# EAGLE board labwiz-board-0.3 (EAGLE 6.5.0)
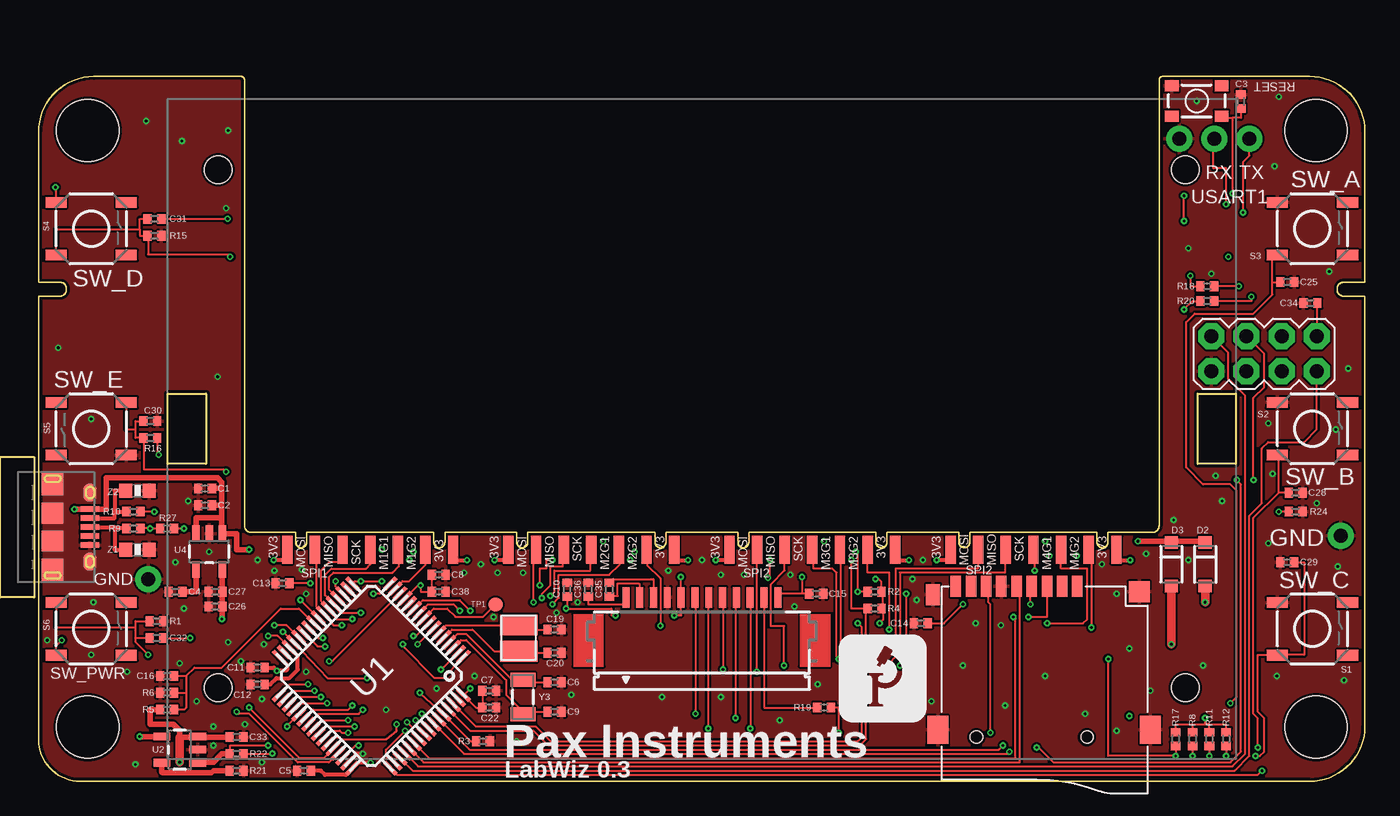
[diagram p0: board, top side]
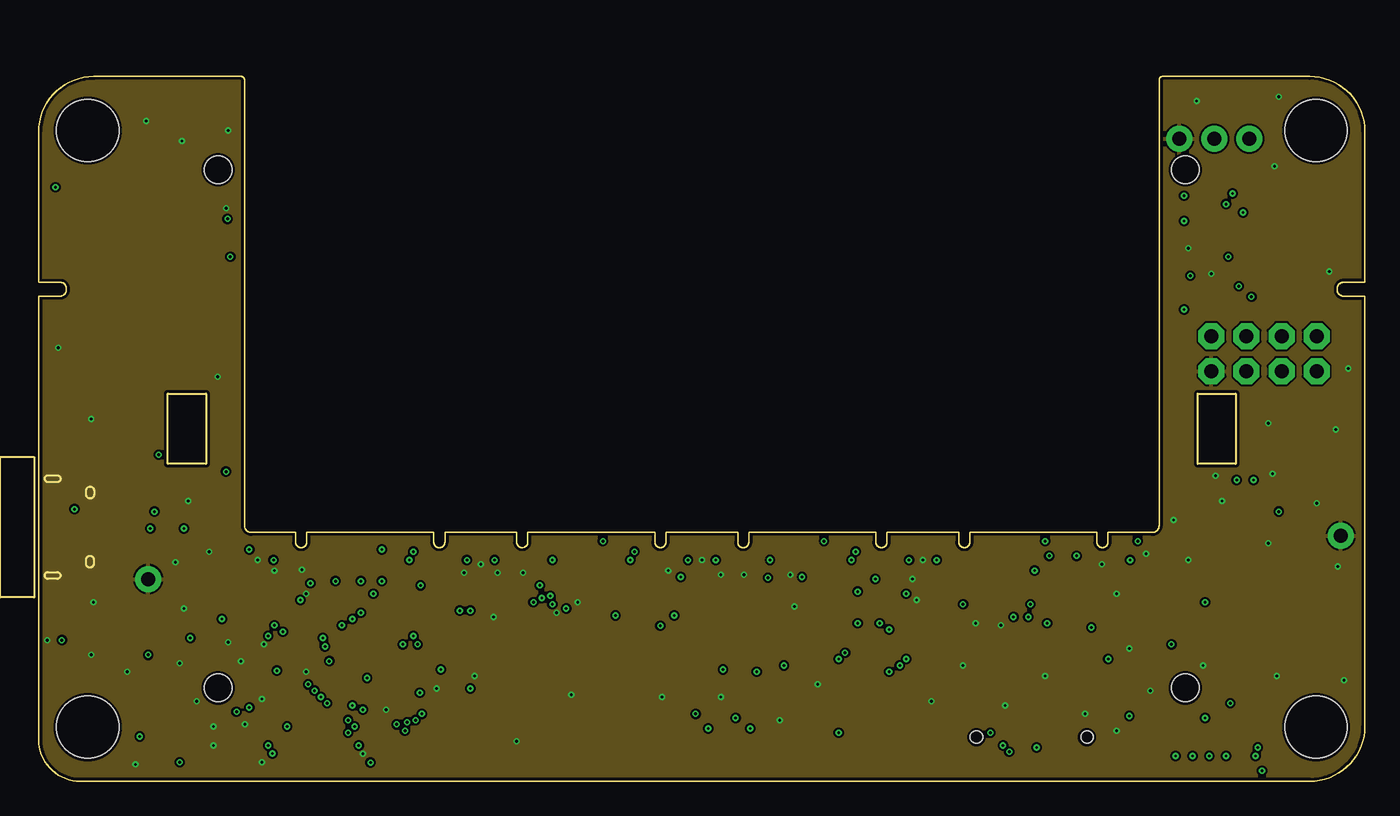
[diagram p1: board, inner layer GND]
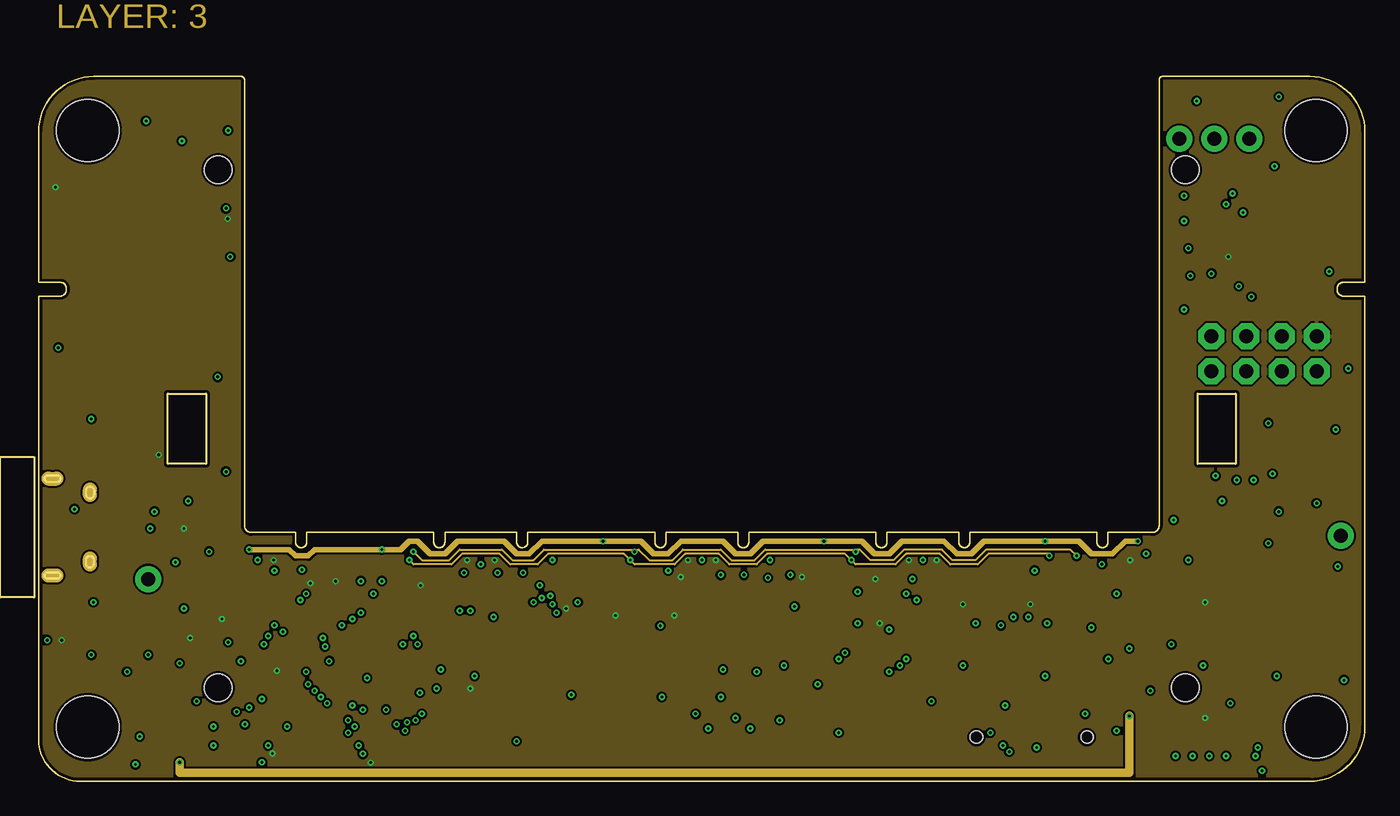
[diagram p2: board, inner layer 3.3V]
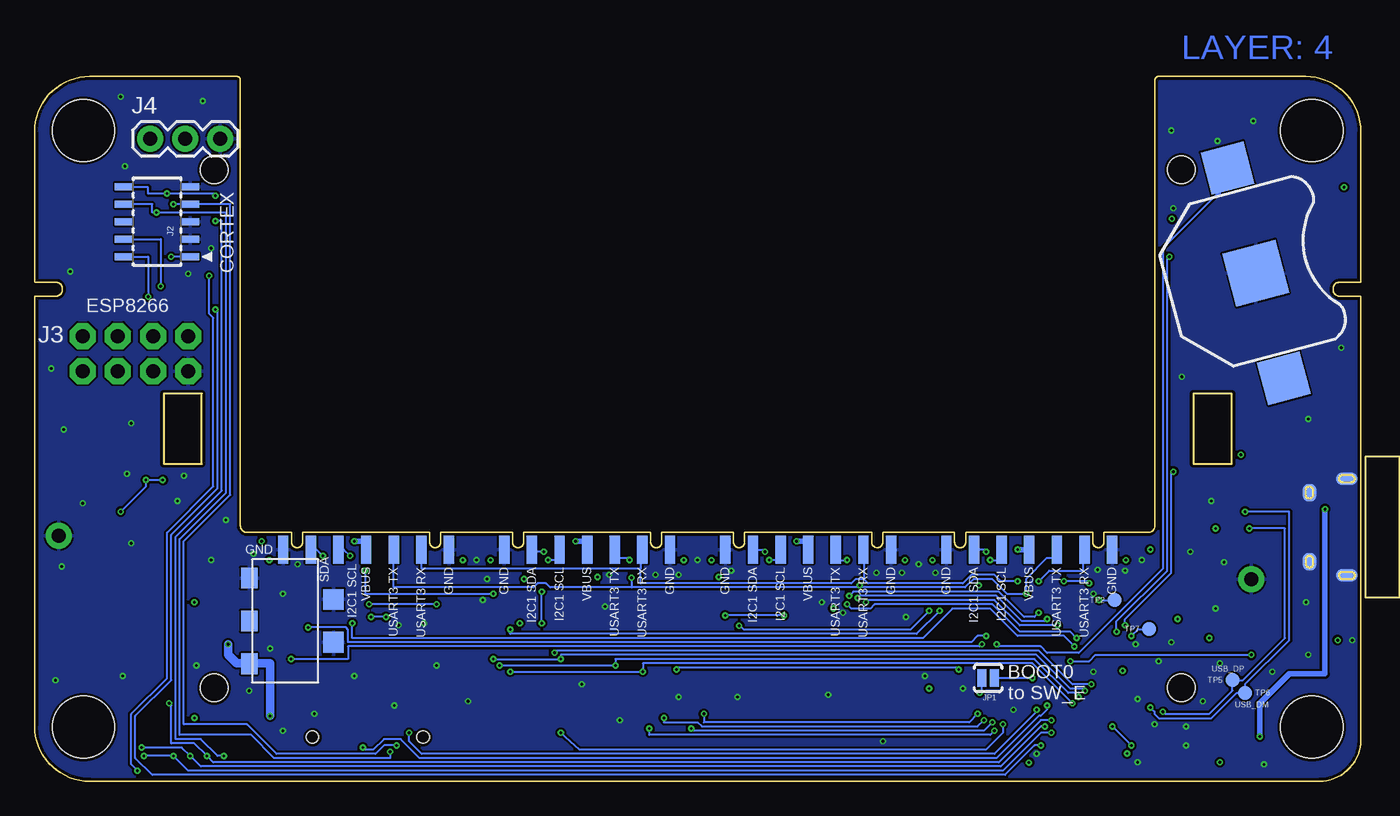
[diagram p3: board, bottom side, seen from below]

Size 96 x 51 mm. Coordinates in mm from the lower left corner, seen from the top.
Outline: 92,0 3,0 arc-90 0,3 0,35.1 1.6,35.1 arc90 2,35.6 arc90 1.6,36.1 0,36.1 0,47 arc-90 4,51 14.65,51 arc-90 14.9,50.75 14.9,18.5 arc90 15.4,18 18.6,18 18.6,17.3 arc180 19.4,17.3 19.4,18 28.6,18 28.6,17.3 arc180 29.4,17.3 29.4,18 34.6,18 34.6,17.3 arc180 35.4,17.3 35.4,18 44.6,18 44.6,17.3 arc180 45.4,17.3 45.4,18 50.6,18 50.6,17.3 arc180 51.4,17.3 51.4,18 60.6,18 60.6,17.3 arc180 61.4,17.3 61.4,18 66.6,18 66.6,17.3 arc180 67.4,17.3 67.4,18 76.6,18 76.6,17.3 arc180 77.4,17.3 77.4,18 80.6,18 arc90 81.1,18.5 81.1,50.75 arc-90 81.35,51 92,51 arc-90 96,47 96,36.1 94.4,36.1 arc90 94,35.6 arc90 94.4,35.1 96,35.1 96,4 arc-90 92,0
Copper layers (1*2+15*16): Top 0.017mm / dielectric 0.5mm / GND 0.017mm / dielectric 0.075mm / 3.3V 0.017mm / dielectric 0.5mm / Bottom 0.017mm
Design rules "PaxInstrument-T400 *": minimum track width 0.1mm, minimum drill 0.2mm, track to track 0.075mm, track to pad 0.075mm, pad to pad 0.075mm, via to via 0.075mm, smd to smd 0.075mm, copper to edge 0.2mm, drill to drill 0.2mm, minimum pad ring 0.125mm, minimum via ring 0.125mm, stop-mask expansion 0mil, vias tented up to drill 0.45mm, thermal gap 0.15mm
Net classes: 0 Digital signal: width 0.1 mm, drill 0.2 mm, clearance 0.15 mm; 1 3.3V power: width 0.1 mm, drill 0.2 mm, clearance 0.15 mm; 2 RTC battery: width 0.1 mm, drill 0.2 mm, clearance 0.15 mm; 3 5V power: width 0.1 mm, drill 0.2 mm, clearance 0.15 mm; 4 Analog signal: width 0.1 mm, drill 0.2 mm, clearance 0.15 mm; 5 GND: width 0.1 mm, drill 0.2 mm, clearance 0.15 mm
Holes 4.5 mm at 92.45,3.91 92.45,47.09 3.55,47.09 3.55,3.91
tKeepout: area 0,0.4 to 7,7.4; area 0,43.6 to 7.1,50.6; area 89,43.6 to 96,50.6; area 89,0.4 to 96,7.4
vRestrict: area 15,1.4 to 81,52.2
Milling: 4 lines

## Footprints (pad centres in the part's own frame; a part is rotated, then mirrored left to right if it is on the bottom)
BATTCON_12MM = smd 3.962 x 3.962: GND 0,0 | smd 3.175 x 3.175: PWR@1 -7.874,0; PWR@2 7.874,0
0402 = smd 0.6 x 0.7: 1 -0.5,0; 2 0.5,0
SOD-123 = smd 0.9 x 0.95: A 1.575,0; C -1.575,0
SD_MICRO_1 = smd 1.524 x 0.762: 1 -7.493,2.414; 2 -7.493,1.314; 3 -7.493,0.214; 4 -7.493,-0.886; 5 -7.493,-1.986; 6 -7.493,-3.086; 7 -7.493,-4.186; 8 -7.493,-5.286; 9 -7.493,-6.386 | smd 1.524 x 1.016: G1 -6.893,-8.032 | smd 2.032 x 1.524: G2 2.88,-7.686; G3 2.88,7.714 | smd 1.524 x 1.524: G4 -7.101,6.895 | hole 0.889: 3.407,-4.886; 3.407,3.114
SAMTECH_FTSH-105-01 = smd 0.508 x 1.27: 1 -2.54,-2.413; 2 -2.54,2.413; 3 -1.27,-2.413; 4 -1.27,2.413; 5 0,-2.413; 6 0,2.413; 7 1.27,-2.413; 8 1.27,2.413; 9 2.54,-2.413; 10 2.54,2.413
2X4 = drill 1.016 pad 1.88 octagon: 1 -3.81,-1.27; 2 -3.81,1.27; 3 -1.27,-1.27; 4 -1.27,1.27; 5 1.27,-1.27; 6 1.27,1.27; 7 3.81,-1.27; 8 3.81,1.27
1X03 = drill 1.016 pad 1.88: 1 0,0; 2 2.54,0; 3 5.08,0
PAD-JUMPER-2-NO_YES_SILK = smd 0.635 x 1.27: 1 -0.45,0; 2 0.45,0
M07X2_2MM_EDGE = smd 0.75 x 2: P$1 0,-0.25; P$3 2,-0.25; P$5 4,-0.25; P$7 6,-0.25; P$9 8,-0.25; P$11 10,-0.25; P$13 12,-0.25 | smd 0.75 x 2 bottom: P$2 0,-0.25; P$4 2,-0.25; P$6 4,-0.25; P$8 6,-0.25; P$10 8,-0.25; P$12 10,-0.25; P$14 12,-0.25
TACTILE_SWITCH_SMD = smd 1.524 x 0.762: 1 -2.54,1.905; 2 2.54,1.905; 3 -2.54,-1.905; 4 2.54,-1.905
TACTILE_SWITCH_SMD-3 = smd 1 x 0.8: 1 -1.8,1.1; 2 1.8,1.1; 3 -1.8,-1.1; 4 1.8,-1.1
PAD_1MM = smd 1 x 1: P$1 0,0
M01_TH = drill 1.016 pad 1.88: P$1 0,0
TQFP64 = smd 1.2 x 0.3: 1 -5.7,3.75; 2 -5.7,3.25; 3 -5.7,2.75; 4 -5.7,2.25; 5 -5.7,1.75; 6 -5.7,1.25; 7 -5.7,0.75; 8 -5.7,0.25; 9 -5.7,-0.25; 10 -5.7,-0.75; 11 -5.7,-1.25; 12 -5.7,-1.75; 13 -5.7,-2.25; 14 -5.7,-2.75; 15 -5.7,-3.25; 16 -5.7,-3.75; 33 5.7,-3.75; 34 5.7,-3.25; 35 5.7,-2.75; 36 5.7,-2.25; 37 5.7,-1.75; 38 5.7,-1.25; 39 5.7,-0.75; 40 5.7,-0.25; 41 5.7,0.25; 42 5.7,0.75; 43 5.7,1.25; 44 5.7,1.75; 45 5.7,2.25; 46 5.7,2.75; 47 5.7,3.25; 48 5.7,3.75 | smd 0.3 x 1.2: 17 -3.75,-5.7; 18 -3.25,-5.7; 19 -2.75,-5.7; 20 -2.25,-5.7; 21 -1.75,-5.7; 22 -1.25,-5.7; 23 -0.75,-5.7; 24 -0.25,-5.7; 25 0.25,-5.7; 26 0.75,-5.7; 27 1.25,-5.7; 28 1.75,-5.7; 29 2.25,-5.7; 30 2.75,-5.7; 31 3.25,-5.7; 32 3.75,-5.7; 49 3.75,5.7; 50 3.25,5.7; 51 2.75,5.7; 52 2.25,5.7; 53 1.75,5.7; 54 1.25,5.7; 55 0.75,5.7; 56 0.25,5.7; 57 -0.25,5.7; 58 -0.75,5.7; 59 -1.25,5.7; 60 -1.75,5.7; 61 -2.25,5.7; 62 -2.75,5.7; 63 -3.25,5.7; 64 -3.75,5.7
SOT23-5 = smd 0.55 x 1.2: 1 -0.95,-1.3; 2 0,-1.3; 3 0.95,-1.3; 4 0.95,1.3; 5 -0.95,1.3
USB_MICRO_THRUHOLE = smd 1.645 x 1.55: PAD$1 -3.123,0; PAD$4 3.123,0 | smd 1.5 x 1.55: PAD$2 -1,0; PAD$3 1,0 | smd 1.25 x 0.95: PAD$5 -2.5,2.7; PAD$6 2.5,2.7 | smd 0.9 x 1.55 bottom: PAD$7 -3.5,0; PAD$8 3.5,0 | smd 1.25 x 0.95 bottom: PAD$9 -2.5,2.7; PAD$10 2.5,2.7 | smd 0.4 x 1.35: PIN$1 -1.3,2.7; PIN$2 -0.65,2.7; PIN$3 0,2.7; PIN$4 0.65,2.7; PIN$5 1.3,2.7
LG132643-DG = hole 2: -35,-18.75; 35,-18.75; 35,18.75; -35,18.75
BL-XX-BATTERY = smd 1.5 x 1.2: P$1 3.1,-0.2; P$2 0,-0.2; P$3 -3.1,-0.2 | smd 1.5 x 1.5: P$4 1.55,5.9; P$5 -1.55,5.9
NX3225GD = smd 1.5 x 2.7: P$1 0.95,0; P$2 -0.95,0
FPC_12P_1MM = smd 0.5 x 1.5: 1 -5.5,2.297; 2 -4.5,2.297; 3 -3.5,2.297; 4 -2.5,2.297; 5 -1.5,2.297; 6 -0.5,2.297; 7 0.5,2.297; 8 1.5,2.297; 9 2.5,2.297; 10 3.5,2.297; 11 4.5,2.297; 12 5.5,2.297
CRYSTAL-SMD-3.2X1.5MM = smd 1 x 1.8: P$1 -1.25,0; P$2 1.25,0
SPARKFUN-RESISTORS_0603-RES = smd 0.94 x 1.016: 1 -0.85,0; 2 0.85,0

## Placement (x,y rotation side)
BAT1  [BATTCON_12MM]  7.61,36.76 285 bottom
C1  4.7uF  [0402]  12.04,21.18 0 top
C2  100nF  [0402]  12.04,19.96 0 top
C3  100nF  [0402]  87.02,49.18 90 top
C4  470pF  [0402]  9.91,13.72 180 top
C5  100nF  [0402]  19.2,0.76 180 top
C6  8pF  [0402]  37.34,7.16 0 top
C7  100nF  [0402]  32.61,6.55 0 top
C8  10nF  [0402]  28.96,14.94 0 top
C9  8pF  [0402]  37.34,5.03 0 top
C10  100nF  [0402]  38.25,13.87 270 top
C11  100nF  [0402]  15.85,8.23 180 top
C12  4.7uF  [0402]  15.85,7.01 0 top
C13  100nF  [0402]  17.65,14.33 180 top
C14  100nF  [0402]  63.86,11.43 0 top
C15  100nF  [0402]  56.28,13.56 180 top
C16  100nF  [0402]  9.3,7.62 180 top
C19  8pF  [0402]  37.34,10.97 0 top
C20  8pF  [0402]  37.34,9.3 0 top
C22  4.7uF  [0402]  32.61,5.33 180 top
C25  100nF  [0402]  90.37,36.12 180 top
C26  10uF  [0402]  12.8,12.65 0 top
C27  100nF  [0402]  12.8,13.72 0 top
C28  100nF  [0402]  90.98,20.88 180 top
C29  100nF  [0402]  90.37,15.85 0 top
C30  100nF  [0402]  8.08,26.06 180 top
C31  100nF  [0402]  8.38,40.69 0 top
C32  100nF  [0402]  8.53,10.36 0 top
C33  10uF  [0402]  14.33,3.2 0 top
C34  10uF  [0402]  92.05,34.59 0 top
C35  1uF  [0402]  41.3,13.87 270 top
C36  1uF  [0402]  39.78,13.87 270 top
C38  1uF  [0402]  28.96,13.72 180 top
D2  1N4148W  [SOD-123]  81.98,15.7 270 top
D3  1N4148W  [SOD-123]  84.43,15.7 270 top
J1  SD_MICRO_SDIO_1BIT  [SD_MICRO_1]  72.77,6.6 270 top
J2  CORTEX_DEBUGSMD  [SAMTECH_FTSH-105-01]  87.13,40.49 90 bottom
J3  DNP  [2X4]  88.7,30.94 0 top
J4  [1X03]  87.63,46.48 0 bottom
JP1  DNP  [PAD-JUMPER-2-NO_YES_SILK]  26.97,7.47 180 bottom
MODULE1  PI-module-female  [M07X2_2MM_EDGE]  18,17 0 top
MODULE2  PI-module-female  [M07X2_2MM_EDGE]  34,17 0 top
MODULE3  PI-module-female  [M07X2_2MM_EDGE]  50,17 0 top
MODULE4  PI-module-female  [M07X2_2MM_EDGE]  66,17 0 top
R1  10K  [0402]  8.53,11.58 180 top
R2  1.5K  [0402]  60.5,13.72 180 top
R3  10K  [0402]  32.16,2.9 180 top
R4  1.5K  [0402]  60.5,12.5 180 top
R5  10K  [0402]  9.3,5.18 180 top
R6  10K  [0402]  9.3,6.4 0 top
R8  10K  [0402]  83.52,3.05 270 top
R9  22R  [0402]  6.86,18.29 0 top
R10  22R  [0402]  6.86,19.51 0 top
R11  10K  [0402]  84.73,3.05 270 top
R12  10K  [0402]  85.95,3.05 270 top
R15  10K  [0402]  8.38,39.47 180 top
R16  10K  [0402]  8.08,24.84 180 top
R17  10K  [0402]  82.3,3.05 270 top
R18  100R  [0402]  84.58,35.81 0 top
R19  3.3R  [0402]  56.85,5.33 0 top
R20  100R  [0402]  84.58,34.75 0 top
R21  10K  [0402]  14.33,0.76 0 top
R22  10K  [0402]  14.33,1.98 0 top
R24  10K  [0402]  90.98,19.51 0 top
R27  1.5K  [0402]  9.3,18.29 0 top
S1  SWITCH-MOMENTARY-2SMD  [TACTILE_SWITCH_SMD]  92.2,11.02 0 top
S2  SWITCH-MOMENTARY-2SMD  [TACTILE_SWITCH_SMD]  92.2,25.5 0 top
S3  SWITCH-MOMENTARY-2SMD  [TACTILE_SWITCH_SMD]  92.2,39.98 0 top
S4  SWITCH-MOMENTARY-2SMD  [TACTILE_SWITCH_SMD]  3.8,39.98 0 top
S5  SWITCH-MOMENTARY-2SMD  [TACTILE_SWITCH_SMD]  3.8,25.5 180 top
S6  SWITCH-MOMENTARY-2SMD  [TACTILE_SWITCH_SMD]  3.8,11.02 0 top
S7  SWITCH-MOMENTARY-2SMD-3  [TACTILE_SWITCH_SMD-3]  83.82,49.23 0 top
TP1  DNP  [PAD_1MM]  33.07,12.8 0 top
TP2  DNP  [PAD_1MM]  17.83,13.11 0 bottom
TP3  DNP  [M01_TH]  94.25,17.75 0 top
TP4  DNP  [M01_TH]  7.92,14.63 0 top
TP5  DNP  [PAD_1MM]  9.3,7.32 0 bottom
TP6  DNP  [PAD_1MM]  8.38,6.4 0 bottom
TP7  DNP  [PAD_1MM]  15.31,11.01 0 bottom
U1  STM32F10XRXT6  [TQFP64]  24.08,7.62 225 top
U2  MCP73831  [SOT23-5]  10.21,2.29 90 top
U4  MIC5219-3.3V  [SOT23-5]  12.34,16.61 180 top
U$1  USB_MICROSMT+THRUHULE  [USB_MICRO_THRUHOLE]  1.01,18.39 270 top
U$2  DNP  [FOUR_LAYER_WARNING]  0,-3 0 top
U$3  LG132643-DG  [LG132643-DG]  48,25.5 0 top
U$4  BL-XX_BATTERY_7-7  [BL-XX-BATTERY]  80.26,11.6 270 bottom
U$6  [PAX-LOGO-0.25IN]  57.91,4.27 0 top
U$9  8MHz  [NX3225GD]  34.75,10.36 90 top
X2  M12_BOTTOM_CONTACTS_FPC_1MM  [FPC_12P_1MM]  48,11 0 top
Y3  32.768kHz  [CRYSTAL-SMD-3.2X1.5MM]  35.05,6.1 270 top
Z1  PGB1010603  [SPARKFUN-RESISTORS_0603-RES]  7.16,16.76 180 top
Z2  PGB1010603  [SPARKFUN-RESISTORS_0603-RES]  7.16,21.03 180 top

## Library data of the parts
BAT1 = PaxInstruments-Electromechanical; MF: Keystone Electronics; MPN: 3000TR
C1-C16 C19 C20 C22 C25-C36 C38 R1-R6 R8-R12 R15-R22 R24 R27 = PaxInstruments-RCL
D2 D3 = SparkFun-DiscreteSemi
J1 TP1-TP7 = PaxInstruments-Connectors
J2-J4 = SparkFun-Connectors
JP1 = SparkFun-Passives
MODULE1-MODULE4 = PaxInstruments-Connectors; MF: Pax Instruments; MPN: PIxxxx
S1-S6 = SparkFun-Electromechanical; MF: C&K Components; MPN: RS-187R05A2-DS MT RT
S7 = PaxInstruments-Electromechanical
U1 = stm32
U2 = PaxInstruments-PowerIC; MF: Microchip Technology; MPN: MCP73832T-2DCI/OT
U4 = SparkFun; MF: Micrel; MPN: MIC5219-3.3YM5 TR
U$1 = blinkinlabs; MF: FCI; MPN: 10118194-0001LF
U$2 = SparkFun-Aesthetics
U$3 = PaxInstruments-Displays; MF: Pax Instruments; MPN: LG132643-DW
U$4 = PaxInstruments-Connectors; MPN: BC-4-3P (77H)
U$6 = PaxInstruments-Aesthetics
U$9 = PaxInstruments-FreqCtrl
X2 = PaxInstruments-Connectors; MF: Hirose Connector; MPN: FH12-12S-1SH(55)
Y3 = SparkFun-FreqCtrl; PROD_ID: XTAL-13062
Z1 Z2 = PaxInstrument-T400; MF: Littelfuse; MPN: PGB1010603NRHF

## Nets
3.3V: C5.1 C7.1 C8.1 C10.2 C11.1 C13.1 C14.2 C15.2 C22.2 C26.2 C27.2 C31.2 C32.2 C34.2 C38.2 D3.A J1.4 J2.1 J3.8 MODULE1.P$1 MODULE1.P$13 MODULE2.P$1 MODULE2.P$13 MODULE3.P$1 MODULE3.P$13 MODULE4.P$1 MODULE4.P$13 R2.1 R4.1 R8.1 R11.1 R12.1 R16.1 R17.1 R22.2 R27.2 S4.1 S6.3 U1.13 U1.19 U1.32 U1.48 U1.64 U4.5 X2.5 X2.12
BATT_STAT: R22.1 U1.37 U2.1
BOOT0: JP1.2 R3.2 U1.60
D+: R9.1 U$1.PIN$3 Z1.2
D-: R10.1 U$1.PIN$2 Z2.2
GND [GND]: BAT1.GND C1.1 C2.1 C3.2 C4.2 C5.2 C6.2 C7.2 C8.2 C9.2 C10.1 C11.2 C12.1 C13.2 C14.1 C15.1 C16.2 C19.2 C20.2 C22.1 C25.1 C26.1 C27.1 C28.1 C29.1 C30.1 C33.2 C34.1 C36.1 C38.1 J1.6 J1.G1 J1.G2 J1.G3 J1.G4 J2.3 J2.5 J2.9 J3.1 J4.3 MODULE1.P$2 MODULE1.P$14 MODULE2.P$2 MODULE2.P$14 MODULE3.P$2 MODULE3.P$14 MODULE4.P$2 MODULE4.P$14 R1.1 R3.1 R6.1 R15.1 R21.2 R24.2 S1.1 S2.1 S3.1 S5.1 S7.1 TP3.P$1 TP4.P$1 U1.12 U1.18 U1.31 U1.47 U1.63 U2.2 U4.2 U$1.PAD$1 U$1.PAD$2 U$1.PAD$3 U$1.PAD$4 U$1.PAD$5 U$1.PAD$6 U$1.PAD$7 U$1.PAD$8 U$1.PAD$9 U$1.PAD$10 U$1.PIN$5 U$4.P$3 U$4.P$4 U$4.P$5 X2.4 Z1.1 Z2.1
I2C1_SCL: MODULE1.P$10 MODULE2.P$10 MODULE3.P$10 MODULE4.P$10 R4.2 U1.61
I2C1_SDA [3.3V power]: MODULE1.P$12 MODULE2.P$12 MODULE3.P$12 MODULE4.P$12 R2.2 U1.62
LCD_A0: U1.2 X2.8
LCD_BL: R19.2 U1.43
LCD_CS: U1.50 X2.10
LCD_MOSI: U1.57 X2.6
LCD_RST: U1.56 X2.9
LCD_SCK: U1.55 X2.7
MOD1_GPIO1: MODULE1.P$9 U1.20
MOD1_GPIO2: MODULE1.P$11 U1.15
MOD2_GPIO1: MODULE2.P$9 U1.26
MOD2_GPIO2: MODULE2.P$11 U1.11
MOD3_GPIO1: MODULE3.P$9 U1.33
MOD3_GPIO2: MODULE3.P$11 U1.10
MOD4_GPIO1: MODULE4.P$9 U1.27
MOD4_GPIO2: MODULE4.P$11 U1.8
N$1: C4.1 U4.4
N$4: R19.1 X2.11
N$37: C35.1 X2.3
N$38: C35.2 X2.2
N$39: C36.2 X2.1
N$70: R21.1 U2.5
NRST: C3.1 J2.10 R17.2 S7.4 U1.7
OSC_IN: C20.1 U1.5 U$9.P$2
OSC_OUT: C19.1 U1.6 U$9.P$1
PC1: TP1.P$1 U1.9
PC4: TP2.P$1 U1.24
RTC_BAT [RTC battery]: BAT1.PWR@1 U1.1
RTC_OSC_IN: C9.1 U1.3 Y3.P$2
RTC_OSC_OUT: C6.1 U1.4 Y3.P$1
SDIO_CK: J1.5 U1.53
SDIO_CMD: J1.3 U1.54
SDIO_D0: J1.7 U1.39
SPI1_MISO: MODULE1.P$5 MODULE2.P$5 U1.22
SPI1_MOSI: MODULE1.P$3 MODULE2.P$3 U1.23
SPI1_SCK: MODULE1.P$7 MODULE2.P$7 U1.21
SPI2_MISO: MODULE3.P$5 MODULE4.P$5 U1.35
SPI2_MOSI: MODULE3.P$3 MODULE4.P$3 U1.36
SPI2_SCK: MODULE3.P$7 MODULE4.P$7 U1.34
SW_A: C25.2 R8.2 S3.3 U1.40
SW_B: C28.2 R11.2 S2.3 U1.41
SW_C: C29.2 R12.2 S1.3 U1.42
SW_D_BOOT1: C30.2 R16.2 S5.3 U1.28
SW_E_BOOT0: C31.1 JP1.1 R15.2 S4.3 U1.29
SW_PWR: C32.1 R1.2 S6.1 U1.14
SWCLK: R18.1 U1.49
SWDCLK_M: J2.4 R18.2
SWDIO: R20.1 U1.46
SWDIO_M: J2.2 R20.2
USART1_RX: J2.7 J4.2 U1.59
USART1_TX: J2.8 J4.1 U1.58
USART2_RX: MODULE1.P$4 MODULE2.P$4 MODULE3.P$4 MODULE4.P$4 U1.17
USART2_TX: MODULE1.P$6 MODULE2.P$6 MODULE3.P$6 MODULE4.P$6 U1.16
USART3_RX: J3.2 U1.52
USART3_TX: J3.7 U1.51
USB_DM: R10.2 TP6.P$1 U1.44
USB_DP: R9.2 R27.1 TP5.P$1 U1.45
VBAT: C33.1 D2.A R5.2 U2.3 U$4.P$1
VBAT_DROP: C16.1 R5.1 R6.2 U1.25
VBUS [3.3V power]: C1.2 C2.2 D2.C D3.C MODULE1.P$8 MODULE2.P$8 MODULE3.P$8 MODULE4.P$8 U2.4 U4.1 U4.3 U$1.PIN$1
VCAP1: C12.2 TP7.P$1 U1.30
WIFI_EN: J3.4 R24.1 U1.38

## Tracks (layer width: path | path; a pad name or v marks a point on that pad's centre or on a via)
3.3V  (via drill 0.2)
  Top 0.152: U1.13 27.45,14.17 27.6,14.17 v27.65,14.17 27.65,13.72 C38.2 C8.1 | 38.25,12.5 v38.18,12.5 v38.18,12.49 38.25,12.57 C10.2 38.25,12.5 | 38.25,12.5 41.45,12.5 41.45,12.04 41.49,12 v41.75,12 | 46.5,12.06 X2.5 46.5,14.77 v46.48,14.78 | X2.12 53.58,13.22 53.58,13.47 53.49,13.56 C15.2 55.25,13.59 v55.25,14.78 | 46.5,12.06 46.44,12 v46,12 46.5,12 46.5,12.06 | R22.2 15,2 v16.91,2 | v19.66,14.33 C13.1 | U1.19 21.49,14.1 v21.49,14.48 | C7.1 C22.2 31.67,5.33 U1.64 30.78,6.24 v31.24,6.71 | C14.2 65.53,11.43 v66.9,12.8 | v71.78,12.8 71.78,13.99 J1.4 | S4.1 1.26,42.93 v1.22,42.98 | C31.2 v13.67,40.69 | R16.1 8.58,23.73 v8.69,23.62 | R27.2 v10.52,18.29 | C32.2 v10.97,10.36 | S6.3 1.26,9.8 v1.68,10.21 | v60.56,14.63 60.81,14.63 60.96,14.48 60.96,13.76 | 60.96,13.76 R2.1 | R4.1 61.11,12.5 | 61.11,12.5 61.11,11.67 v60.87,11.43 | 61.11,12.5 61.11,13.56 60.96,13.72 60.96,13.76 | 83.52,4.12 84.43,4.12 | 84.73,4.12 85.95,4.12 R12.1 | 84.73,4.12 84.43,4.12 | 84.43,4.12 v84.43,4.57 | R11.1 84.73,4.12 | 83.52,4.12 R8.1 | R17.1 82.3,4.12 83.52,4.12 | J3.8 92.55,32.25 C34.2
  Top 0.305: MODULE1.P$1 18,16 v17,16 | MODULE1.P$13 30,16 v31,16 | MODULE2.P$1 34,16 v33,16 | MODULE2.P$13 46,16 v47,16 | MODULE3.P$1 50,16 v49,16 | MODULE3.P$13 62,16 v63,16 | MODULE4.P$1 66,16 v65,16 | MODULE4.P$13 78,16 v79,16 | v24.02,1.35 23.99,1.37 23.16,1.37 22.96,1.2 U1.48 22.22,0.46 20.73,0.46 20.42,0.76 C5.1 | U1.32 17.98,8.41 17.98,8.08 17.91,8 v17.25,8 17.02,8.23 C11.1
  Top 0.406: U4.5 C27.2 | C27.2 | C27.2 C26.2 | C26.2 | C26.2 13.29,11.77 v13.26,11.73
  Top 0.61: D3.A v84.43,12.95
  Bottom 0.152: v41.75,12 v46,12 | v19.66,14.33 19.81,14.48 v21.49,14.48 | v66.9,12.8 v71.78,12.8 | J2.1 v86.11,37.95
  pour 3.3V: 96,51 96,0 0,0 0,51 14.9,51 14.9,18 81.1,18 81.1,51
BATT_STAT  (via drill 0.2)
  Top 0.152: R22.1 13.87,2.09 13.87,2.59 v16.61,2.59 | U1.37 17.98,4 v17.98,3.96
  Top 0.406: R22.1 13.26,1.98 12.65,1.37 11.55,1.37 U2.1
  Bottom 0.152: v17.98,3.96 v16.61,2.59
BOOT0  (via drill 0.2)
  Top 0.152: v27.58,6.4 28.08,5.94 U1.60 31.28,2.9 R3.2
  Bottom 0.152: v27.58,6.4 27.43,6.56 JP1.2
D+
  Top 0.305: U$1.PIN$3 5.49,18.39 5.49,18.29 | 5.49,18.29 5.49,16.76 Z1.2 | R9.1 5.49,18.29
D-
  Top 0.305: U$1.PIN$2 5.49,19.04 5.49,19.51 | 5.49,19.51 R10.1 | Z2.2 5.49,21.03 5.49,19.51
GND  (via drill 0.2)
  Top 0.305: U1.47 23.01,1.96 23.01,1.98 v23.47,1.98
  other vias: 12.65,2.59 16.15,1.37 14.94,4.11 16.15,5.94 14.63,8.69 17.07,15.24 30.78,15.09 34.59,2.9 31.55,7.62 38.56,6.25 37.49,12.19 39.01,12.95 69.65,11.28 63.55,13.11 78.03,13.56 80.47,6.55 64.62,5.79 64.01,16 80.16,16.46 48.01,16 32,15.7 15.85,16 63.25,14.63 32.92,11.89 19.05,15.3 35.05,15.09 45.57,15.24 51.05,14.94 76.96,15.7 54.71,12.65 78.03,3.66 92.51,20.12 10.82,20.27 12.34,16.61 54.41,14.94 7.78,47.78 13.71,47.08 10.36,46.33 13.56,41.45 1.42,31.37 12.95,29.26 3.81,26.21 9.91,15.85 3.96,12.95 0.61,10.21 3.81,9.14 7.01,1.22 12.65,3.96 11.43,5.79 10.21,8.53 6.4,7.92 10.52,12.5 13.72,10.06 16.31,9.91 19.35,13.56 19.35,7.92 25.15,5.18 28.8,6.71 45.11,6.1 49.38,6.1 53.64,4.42 56.39,7.01 33.22,15.09 49.38,14.94 66.9,8.38 69.95,5.49 67.82,11.43 72.85,7.62 75.74,4.88 78.94,9.6 84.28,8.38 83.21,16 89.61,7.62 94.49,7.32 94.03,15.54 89,17.22 82.14,18.9 85.65,20.27 85.19,22.1 89.31,22.25 93.88,25.45 89,25.91 94.79,29.87 93.42,36.88 84.89,36.73 83.21,38.56 89.46,44.5 83.82,49.23 89.76,49.53
  pour GND: 96,51 96,0 0,0 0,51 14.9,51 14.9,18 81.1,18 81.1,51
  pour Bottom: 0,51 14.9,51 14.9,18 81.1,18 81.1,51 96,51 96,0 0,0
  pour Top: 96,51 81.1,51 81.1,18 14.9,18 14.9,51 0,51 0,0 96,0
I2C1_SCL  (via drill 0.2)
  Top 0.152: v58.83,16 58.83,12.5 R4.2 59.89,12.39 59.89,3.05 59.44,2.59 36.88,2.59 35.81,3.66 31.22,3.66 U1.61
  3.3V 0.152: v73.15,16.31 73.15,16.46 68.73,16.46 67.97,15.7 65.99,15.7 65.23,16.46 62.79,16.46 62.03,15.7 59.13,15.7 v58.83,16 58.37,16.46 52.73,16.46 51.97,15.7 49.99,15.7 49.23,16.46 46.79,16.46 46.02,15.7 43.13,15.7 v42.82,16 42.37,16.46 36.88,16.46 36.12,15.7 34.14,15.7 33.38,16.46 30.63,16.46 29.87,15.7 27.13,15.7 v26.82,16
  Bottom 0.152: MODULE4.P$10 73.61,16.75 v73.15,16.31 | MODULE3.P$10 58,16 v58.83,16 | v26.82,16 26,16 MODULE1.P$10 | MODULE2.P$10 42,16 v42.82,16
I2C1_SDA  (via drill 0.2)
  Top 0.152: R2.2 v59.28,13.72 59.28,16.46 v59.13,16.61 | U1.62 31.63,3.96 35.97,3.96 37.03,2.9 59.28,2.9 59.59,3.2 59.59,11.12 v59.28,11.43
  3.3V 0.152: v75.13,16.31 74.68,16.76 68.58,16.76 67.82,16 66.14,16 65.38,16.76 62.64,16.76 61.87,16 60.2,16 59.44,16.76 59.28,16.76 | 43.13,16.76 36.58,16.76 35.81,16 34.29,16 33.53,16.76 30.48,16.76 29.72,16 27.74,16 v27.13,16.61 | v43.13,16.61 43.13,16.76 | 43.13,16.76 43.43,16.76 44.2,16 45.87,16 46.63,16.76 49.38,16.76 50.14,16 51.82,16 52.58,16.76 59.28,16.76 | 59.28,16.76 v59.13,16.61
  Bottom 0.152: MODULE4.P$12 75.59,16.75 v75.13,16.31 | v59.13,16.61 60,16.61 MODULE3.P$12 | MODULE2.P$12 43.13,16.75 v43.13,16.61 | v27.13,16.61 27.13,16.76 27.99,16.76 MODULE1.P$12 | v59.28,11.43 v59.28,13.72
LCD_A0  (via drill 0.2)
  Top 0.152: X2.8 49.53,13.3 v49.53,8.08 | U1.2 29.13,8.08 v29.11,8.08
  Bottom 0.152: v29.11,8.08 29.26,8.23 49.53,8.23 v49.53,8.08
LCD_BL  (via drill 0.2)
  Top 0.152: U1.43 21.43,3.2 21.79,3.2 21.95,3.05 25.15,3.05 25.91,3.66 v25.91,4.12 | v57.91,3.5 57.91,5.33 R19.2
  Bottom 0.152: v25.91,4.12 25.91,3.5 27.13,2.29 56.54,2.29 v57.91,3.5
LCD_CS  (via drill 0.2)
  Top 0.152: X2.10 51.51,13.3 v51.51,3.81 | U1.50 25.3,1.65 25.3,1.68 25.15,1.83 25.15,2.29 v26.52,3.66
  Bottom 0.152: v51.51,3.81 51.51,3.35 26.82,3.35 v26.52,3.66
LCD_MOSI  (via drill 0.2)
  Top 0.152: X2.6 47.55,13.3 v47.55,4.88 | U1.57 27.74,4.16 v27.74,4.88
  Bottom 0.152: v47.55,4.88 47.55,4.27 28.35,4.27 v27.74,4.88
LCD_RST  (via drill 0.2)
  Top 0.152: X2.9 50.44,13.3 v50.44,4.57 | U1.56 27.43,3.76 27.43,4.27 v27.28,4.42
  Bottom 0.152: v50.44,4.57 50.44,4.27 48.01,4.27 47.7,3.96 27.74,3.96 v27.28,4.42
LCD_SCK  (via drill 0.2)
  Top 0.152: X2.7 48.46,13.3 v48.46,3.81 | U1.55 27.05,3.44 27.05,3.89 v26.67,4.27
  Bottom 0.152: v48.46,3.81 48.46,3.66 27.28,3.66 v26.67,4.27
MOD1_GPIO1
  Top 0.152: U1.20 21.03,13.85 21.03,14.78 21.34,15.09 25.6,15.09 26.06,15.54 26.06,16.69 MODULE1.P$9
MOD1_GPIO2
  Top 0.152: U1.15 26.34,14.48 26.82,14.48 28,15.66 MODULE1.P$11
MOD2_GPIO1  (via drill 0.2)
  Top 0.152: U1.26 20.27,10.36 v20.57,10.36 | v37.19,12.8 37.64,13.26 37.64,14.94 41.3,14.94 42.06,15.7 42.06,16.69 MODULE2.P$9
  Bottom 0.152: v20.57,10.36 21.03,10.82 24.69,10.82 26.67,12.8 35.2,12.8 35.51,12.5 36.88,12.5 v37.19,12.8
MOD2_GPIO2  (via drill 0.2)
  Top 0.152: U1.11 27.8,13.11 30.48,13.11 v31.24,12.34 | MODULE2.P$11 44.04,16.15 44.04,15.64 45,14.68 v45,11.25
  Bottom 0.152: v31.24,12.34 32.61,10.97 44.65,10.97 44.93,11.25 v45,11.25
MOD3_GPIO1  (via drill 0.2)
  Top 0.152: U1.33 18.17,7.01 v19.51,7.01 | v58.37,9.3 58.06,9.6 58.06,16 58,16.07 MODULE3.P$9
  Bottom 0.152: v19.51,7.01 20.88,7.01 23.32,9.45 58.37,9.45 v58.37,9.3
MOD3_GPIO2  (via drill 0.2)
  Top 0.152: U1.10 28.2,12.8 30.02,12.8 v30.48,12.34 | v61.57,10.97 61.57,15.09 60,15.09 MODULE3.P$11
  Bottom 0.152: v30.48,12.34 32.16,10.67 61.57,10.67 v61.57,10.97
MOD4_GPIO1  (via drill 0.2)
  Top 0.152: v73,11.43 75.59,11.43 75.89,11.73 75.89,15.39 74,15.39 MODULE4.P$9 | U1.27 20.18,9.75 v20.73,9.75
  Bottom 0.152: v73,11.43 73,10.36 31.7,10.36 29.57,12.5 26.82,12.5 24.84,10.52 21.49,10.52 v20.73,9.75
MOD4_GPIO2  (via drill 0.2)
  Top 0.152: MODULE4.P$11 76.2,16.75 v76.2,11.12 | U1.8 27.33,10.52 v27.13,10.52
  Bottom 0.152: v27.13,10.52 27.74,10.52 28.19,10.06 73.3,10.06 73.3,10.97 73.46,11.12 v76.2,11.12
N$1
  Top 0.406: U4.4 11.39,13.72 C4.1
N$4
  Top 0.152: X2.11 52.5,5.33 56.24,5.33 56.28,5.38 R19.1
N$10
  3.3V 1: 0.7,14.9 1.3,14.9
N$12
  3.3V 1: 3.7,15.7 3.7,16.1
N$14
  3.3V 1: 0.7,21.9 1.3,21.9
N$37
  Top 0.152: C35.1 41.26,14.48 41.45,14.48 41.6,14.63 44.35,14.63 44.5,14.63 X2.3
N$38
  Top 0.152: C35.2 41.19,13.41 41.91,13.41 41.91,14.33 43.43,14.33 43.5,14.26 X2.2
N$39
  Top 0.152: C36.2 39.78,12.8 42.52,12.8 42.5,12.82 X2.1
N$70
  Top 0.406: U2.5 8.91,0.69 8.99,0.61 12.5,0.61 12.65,0.76 R21.1
NRST  (via drill 0.2)
  Top 0.152: U1.7 v27.43,9.91 | v77.42,8.84 77.42,1.83 v82.3,1.83 R17.2 | v82.91,40.54 v82.91,42.37 | C3.1 87.02,48.01 86.41,48.01 | S7.4 85.43,48.01 86.41,48.01 | 86.41,48.01 v86.41,42.52
  Bottom 0.152: v27.43,9.91 27.58,9.75 73.3,9.75 73.3,8.84 v77.42,8.84 | v82.3,1.83 82.75,1.83 83.97,3.05 85.8,3.05 85.8,17.68 82.45,21.03 82.45,40.54 v82.91,40.54 | v82.91,42.37 82.91,42.52 v86.41,42.52 87.78,42.52 87.78,42.98 89,42.98 89,43.03 J2.10
OSC_IN
  Top 0.152: U1.5 29.91,10.97 31.39,10.97 32.95,9.41 U$9.P$2 35.09,9.3 C20.1
OSC_OUT
  Top 0.152: U1.6 29.5,11.28 34.41,11.28 U$9.P$1 35.09,10.97 C19.1
PC1
  Top 0.152: U1.9 28.6,12.5 29.57,12.5 30.18,11.89 32.16,11.89 TP1.P$1
PC4  (via drill 0.2)
  Top 0.152: U1.24 v18.95,13.11
  Bottom 0.152: v18.95,13.11 TP2.P$1
PULLBACK_1
  3.3V 1: 3.7,20.7 3.7,21.1
RTC_BAT  (via drill 0.2)
  Top 0.152: U1.1 30.61,8.82 29.26,7.47 28.65,7.47 26.36,9.75 v26.36,9.91
  Bottom 0.152: 10.3,42.58 14.33,38.56 14.33,15.39 20.42,9.3 22.71,9.3 23.16,9.75 26.21,9.75 v26.36,9.91
  Bottom 0.406: 10.3,42.58 10.3,43.15 BAT1.PWR@1
RTC_OSC_IN
  Top 0.152: U1.3 30.56,10.21 30.94,10.21 33.83,7.32 33.83,6.25 35.05,5.03 | 35.05,5.03 Y3.P$2 | 35.05,5.03 C9.1
RTC_OSC_OUT
  Top 0.152: U1.4 30.31,10.67 30.94,10.67 34.26,7.35 Y3.P$1 35.23,7.16 C6.1
SDIO_CK
  Top 0.152: U1.53 27.85,1.37 71.02,1.37 71.02,13.56 70.78,13.56 J1.5
SDIO_CMD  (via drill 0.2)
  Top 0.152: U1.54 28.25,1.68 70.71,1.68 70.71,11.73 v70.56,11.89 | v71.63,11.89 73,11.89 73,13.41 72.85,13.56 72.85,13.96 J1.3
  Bottom 0.152: v70.56,11.89 v71.63,11.89
SDIO_D0  (via drill 0.2)
  Top 0.152: U1.39 20.27,4.88 23.16,4.88 v23.47,5.18 | v68.89,3.5 68.89,12.8 68.73,12.95 68.73,13.94 J1.7
  Bottom 0.152: v23.47,5.18 23.47,5.03 26.52,1.98 67.97,1.98 68.89,2.9 v68.89,3.5
SPI1_MISO  (via drill 0.2)
  Top 0.152: MODULE1.P$5 21.95,16.7 21.95,15.85 21.03,15.85 20.42,15.24 20.42,13.04 U1.22 21.58,11.73 v22.71,11.73 | v36.42,13.26 36.42,13.56 37.03,14.17 37.03,15.54 37.95,15.54 37.95,16.15 38,16.21 MODULE2.P$5
  Bottom 0.152: v22.71,11.73 22.86,11.58 24.54,11.58 26.36,13.41 36.27,13.41 v36.42,13.26
SPI1_MOSI  (via drill 0.2)
  Top 0.152: MODULE1.P$3 20,16.27 20.12,16.15 20.12,12.64 U1.23 21.33,11.28 v21.95,11.28 | v35.81,12.95 35.81,16.15 36,16.27 MODULE2.P$3
  Bottom 0.152: v21.95,11.28 24.69,11.28 26.52,13.11 35.81,13.11 v35.81,12.95
SPI1_SCK  (via drill 0.2)
  Top 0.152: MODULE1.P$7 24,15.7 23.7,15.39 21.18,15.39 20.73,14.94 20.73,13.45 U1.21 21.83,12.19 v23.32,12.19 | v37.03,13.41 37.34,13.72 37.34,15.24 39.93,15.24 39.93,16.15 40,16.23 MODULE2.P$7
  Bottom 0.152: v23.32,12.19 23.62,11.89 24.38,11.89 26.21,13.72 36.73,13.72 v37.03,13.41
SPI2_MISO  (via drill 0.2)
  Top 0.152: U1.35 18.67,6.1 v20.42,6.1 | v53.95,8.38 53.95,11.25 53,11.25 53,14.25 54,15.25 MODULE3.P$5 | MODULE4.P$5 69.95,16.75 69.95,15.09 62.33,15.09 v62.33,8.38
  Bottom 0.152: v20.42,6.1 20.73,6.4 21.18,6.4 23.62,8.84 53.95,8.84 v53.95,8.38 v62.33,8.38
SPI2_MOSI  (via drill 0.2)
  Top 0.152: U1.36 18.92,5.64 v20.88,5.64 | v51.97,7.92 52,7.96 MODULE3.P$3 | MODULE4.P$3 68,16.18 67.97,16.15 67.97,15.39 62.03,15.39 62.03,8.99 61.57,8.53 v61.57,7.92
  Bottom 0.152: v20.88,5.64 23.77,8.53 51.97,8.53 v51.97,7.92 v61.57,7.92
SPI2_SCK  (via drill 0.2)
  Top 0.152: U1.34 18.42,6.55 v19.96,6.55 | v57.91,8.84 57.76,8.99 57.76,15.09 57.45,15.39 56.08,15.39 56.08,16 MODULE3.P$7 | MODULE4.P$7 72.08,16.75 v72.08,15.24 | v62.79,13.56 v62.79,8.84
  Bottom 0.152: v19.96,6.55 20.12,6.71 21.03,6.71 23.47,9.14 57.91,9.14 v57.91,8.84 v62.79,8.84 | v72.08,15.24 72.08,13.56 v62.79,13.56
SW_A  (via drill 0.2)
  Top 0.152: U1.40 20.52,4.42 v22.4,4.42 | 89.31,36.12 89.31,38.07 S3.3 | R8.2 v83.52,1.83 | 89.31,36.12 C25.2 | v86.26,5.64 86.72,6.1 86.72,21.03 86.26,21.49 84.28,21.49 83.06,22.71 83.06,33.22 83.67,33.83 87.94,33.83 89.31,35.2 89.31,36.12
  Bottom 0.152: v22.4,4.42 23.16,4.42 26.21,1.37 83.06,1.37 v83.52,1.83 84.43,2.74 86.11,2.74 86.11,5.49 v86.26,5.64
SW_B  (via drill 0.2)
  Top 0.152: U1.41 20.77,3.96 v22.86,3.96 | C28.2 89.76,20.88 | 89.76,20.88 89.76,23.59 S2.3 | R11.2 v84.73,1.83 | v88.24,2.44 88.24,4.57 87.94,4.88 87.94,19.05 89.76,20.88
  Bottom 0.152: v22.86,3.96 23.16,3.96 26.06,1.07 83.97,1.07 v84.73,1.83 85.34,2.44 v88.24,2.44
SW_C  (via drill 0.2)
  Top 0.152: U1.42 21.18,3.66 21.79,3.66 21.95,3.5 v22.4,3.5 | R12.2 v85.95,1.83 | v88.09,1.83 88.39,1.83 88.7,2.13 88.7,4.57 88.24,5.03 88.24,9.14 89.63,9.14 S1.3 89.68,9.14 91.59,9.14 91.59,15.85 C29.2
  Bottom 0.152: v22.4,3.5 23.16,3.5 25.91,0.76 84.89,0.76 v85.95,1.83 v88.09,1.83
SW_D_BOOT1  (via drill 0.2)
  Top 0.152: S5.3 6.34,25.45 7.01,25.45 | 7.01,25.45 7.01,26.06 C30.2 | 7.01,25.45 7.01,24.84 R16.2 7.62,24.8 7.62,22.55 13.41,22.55 v13.56,22.4 | U1.28 17.95,11.28 v17.07,11.28
  Bottom 0.152: v17.07,11.28 17.07,11.73 13.72,15.09 13.72,22.25 v13.56,22.4
SW_E_BOOT0  (via drill 0.2)
  Top 0.152: v23.77,7.47 20.9,7.47 U1.29 17.85,10.67 v17.68,10.82 | S4.3 1.26,39.93 7.32,39.93 | 7.32,39.93 7.32,39.47 R15.2 7.92,39.12 7.92,38.1 13.72,38.1 v13.87,37.95 | 7.32,39.93 7.32,40.69 C31.1
  Bottom 0.152: v23.77,7.47 JP1.1 | v17.68,10.82 17.68,11.58 14.02,15.24 14.02,37.8 v13.87,37.95
SW_PWR  (via drill 0.2)
  Top 0.152: S6.1 1.26,11.12 7.01,11.12 | 7.01,11.12 7.01,11.58 R1.2 | C32.1 7.01,10.36 | 7.01,10.36 7.01,11.12 | U1.14 21.26,8.69 v21.03,8.69 | v7.92,9.14 7.01,10.06 7.01,10.36
  Bottom 0.152: v21.03,8.69 19.66,8.69 19.2,9.14 v7.92,9.14
SWCLK  (via drill 0.2)
  Top 0.152: U1.49 25.94,0.46 88.24,0.46 v88.54,0.76 | v83.36,36.58 83.36,35.81 R18.1
  Bottom 0.152: v88.54,0.76 89,1.22 89,4.88 86.41,7.47 86.41,17.98 83.06,21.34 83.06,33.53 83.36,33.83 v83.36,36.58
SWDCLK_M  (via drill 0.2)
  Top 0.152: v86.87,35.81 R18.2
  Bottom 0.152: J2.4 86.87,39.22 v86.87,35.81
SWDIO  (via drill 0.2)
  Top 0.152: U1.46 22.94,2.59 v23.16,2.59 | v82.91,34.14 83.52,34.75 R20.1
  Bottom 0.152: v23.16,2.59 23.62,2.59 25.76,0.46 87.48,0.46 88.7,1.68 88.7,4.72 86.11,7.32 86.11,17.83 82.75,21.18 82.75,33.98 v82.91,34.14
SWDIO_M  (via drill 0.2)
  Top 0.152: v87.78,35.05 87.78,34.75 R20.2
  Bottom 0.152: J2.2 87.78,37.95 v87.78,35.05
USART1_RX  (via drill 0.2)
  Top 0.152: v69.8,2.59 69.49,2.29 31.18,2.29 U1.59 | v85.95,41.76 85.95,44.35 85.04,44.35 85.04,45.72 85.09,45.77 J4.2
  Bottom 0.152: v69.8,2.59 70.71,2.59 71.32,1.98 78.49,1.98 80.62,4.12 85.19,4.12 85.19,17.37 81.84,20.73 81.84,41.76 84.12,41.76 J2.7 86.1,41.76 v85.95,41.76
USART1_TX  (via drill 0.2)
  Top 0.152: v70.26,2.13 70.1,1.98 30.78,1.98 U1.58 | v87.17,41.15 87.17,44.81 87.63,45.26 J4.1
  Bottom 0.152: v70.26,2.13 70.26,1.68 78.64,1.68 80.31,3.35 85.5,3.35 85.5,17.53 82.14,20.88 82.14,41.15 v87.17,41.15 87.48,41.15 87.48,41.76 89,41.76 J2.8
USART2_RX  (via drill 0.2)
  Top 0.152: v24.84,14.48 v23.32,14.48 22.88,14.48 U1.17
  Bottom 0.152: MODULE1.P$4 20.12,16.75 20.12,15.24 22.55,15.24 v23.32,14.48 | 35.97,14.63 35.66,14.33 28.8,14.33 28.19,14.94 26.52,14.94 26.06,14.48 v24.84,14.48 | 35.97,14.63 36.58,14.63 36.88,14.33 52.12,14.33 52.12,15.39 | 52.12,15.39 68,15.39 MODULE4.P$4 | MODULE2.P$4 35.97,16.72 35.97,14.63 | MODULE3.P$4 arc-90 52.12,16.63 52.12,15.39
USART2_TX  (via drill 0.2)
  Top 0.152: U1.16 24.69,13.56 v24.23,13.56 | v37.19,16 36.73,16 36.73,15.39 36.27,15.39 v36.27,14.17 | v52.94,16 52.88,16 52.88,14.83 v52.78,14.73
  Bottom 0.152: MODULE1.P$6 22,16.15 22.71,16.15 24.23,14.63 v24.23,13.56 25.6,13.56 26.67,14.63 28.04,14.63 28.65,14.02 36.27,14.02 | 36.27,14.02 52.78,14.02 | 52.78,14.02 58.67,14.02 58.98,14.33 59.59,14.33 59.89,14.02 70,14.02 MODULE4.P$6 | MODULE2.P$6 arc90 37.95,16.7 37.95,16.15 arc-90 37.8,16 v37.19,16 | v36.27,14.17 36.27,14.02 | MODULE3.P$6 53.95,16.75 53.95,16.15 52.94,16.15 v52.94,16 | v52.78,14.73 52.78,14.02
USART3_RX
  Top 0.152: U1.52 27.45,1.07 86.41,1.07 87.33,1.98 87.33,27.89 86.11,29.11 86.11,30.99 J3.2
USART3_TX
  Top 0.152: U1.51 27.05,0.76 86.56,0.76 87.63,1.83 87.63,19.2 88.54,20.12 88.54,24.08 89,24.54 91.59,24.54 92.51,25.45 J3.7
USB_DM  (via drill 0.2)
  Top 0.152: U1.44 20.61,1.68 18.9,1.68 v15.24,5.33 | v8.38,19.51 R10.2
  Bottom 0.152: v15.24,5.33 14.94,5.03 14.94,4.88 14.63,4.57 10.82,4.57 8.99,6.4 TP6.P$1 8.38,7.01 5.18,10.21 5.18,19.51 v8.38,19.51
USB_DP  (via drill 0.2)
  Top 0.152: U1.45 21.01,1.37 18.75,1.37 15.24,4.88 14.48,4.88 v14.33,5.03 | R27.1 v8.08,18.29 R9.2
  Bottom 0.152: v14.33,5.03 14.17,4.88 10.97,4.88 9.3,6.55 TP5.P$1 8.53,7.32 5.49,10.36 5.49,18.29 v8.08,18.29
VBAT  (via drill 0.2)
  Top 0.406: C33.1 11.55,3.2 U2.3 11.47,3.24 11.47,3.2 10.21,3.2 10.21,3.66 9.75,4.12 8.08,4.12 8.08,5.18 R5.2
  Top 0.61: v81.99,9.91 v81.98,9.91 D2.A | v10.21,1.37 10.21,3.2
  3.3V 0.61: v78.94,4.72 78.94,0.61 10.21,0.61 v10.21,1.37
  Bottom 0.61: v81.99,9.91 81.99,9.14 81.38,8.53 80.49,8.53 | 80.49,8.53 78.94,8.53 v78.94,4.72 | U$4.P$1 80.49,8.53
VBAT_DROP
  Top 0.152: U1.25 18.85,12.5 17.53,12.5 13.26,8.23 11.28,8.23 10.67,7.62 | 10.67,7.62 10.67,6.4 | 10.67,6.4 10.67,5.33 10.52,5.18 R5.1 | R6.2 10.67,6.4 | C16.1 10.67,7.62
VBUS  (via drill 0.2)
  Top 0.406: v2.59,19.69 U$1.PIN$1 4.88,19.69 4.88,21.95 12.95,21.95 13.26,21.64 13.26,21.18 | U2.4 v7.32,3.24 | 13.26,21.18 13.26,19.96 | 13.26,19.96 13.26,19.05 | 13.26,19.05 13.26,17.95 U4.1 14.33,17.91 14.33,16.76 v15.24,16.76 | C1.2 13.26,21.18 | C2.2 13.26,19.96 | U4.3 11.39,19.05 13.26,19.05 | v79.55,17.37 81.88,17.37 | 81.99,17.37 84.33,17.37
  Top 0.61: 84.43,17.22 D3.C 84.33,17.37 | 81.88,17.37 D2.C 81.98,17.36 81.99,17.37
  3.3V 0.406: v79.55,17.37 78.64,17.37 77.72,16.46 76.2,16.46 75.29,17.37 v72.85,17.37 68.43,17.37 67.51,16.46 66.45,16.46 65.53,17.37 62.48,17.37 61.57,16.46 60.5,16.46 59.59,17.37 v56.84,17.37 52.43,17.37 51.51,16.46 50.44,16.46 49.53,17.37 46.48,17.37 45.57,16.46 44.5,16.46 43.59,17.37 v40.84,17.37 36.42,17.37 35.51,16.46 34.59,16.46 33.68,17.37 30.33,17.37 29.41,16.46 28.35,16.46 27.43,17.37 26.82,17.37 26.21,16.76 v24.84,16.76 19.96,16.76 19.51,16.31 18.59,16.31 18.14,16.76 v15.24,16.76
  Bottom 0.406: v7.32,3.24 7.32,5.64 5.18,7.77 2.59,7.77 v2.59,19.69 | 24.08,16.76 v24.84,16.76 | 40,17.37 v40.84,17.37 | 56,17.37 v56.84,17.37 | 72,17.37 v72.85,17.37
  Bottom 0.61: MODULE1.P$8 24,17.37 24.08,16.76 | MODULE2.P$8 40,17.37 | MODULE3.P$8 56,17.37 | MODULE4.P$8 72,17.37
VCAP1  (via drill 0.2)
  Top 0.152: U1.30 17.3,10.52 v16.61,10.52
  Top 0.305: C12.2 16.76,7.01 17.22,7.47 18.14,7.47 18.75,8.08 18.75,9.06 U1.30
  Bottom 0.152: v16.61,10.52 16.11,11.01 TP7.P$1
WIFI_EN  (via drill 0.2)
  Top 0.152: U1.38 19.87,5.18 22.4,5.18 v22.71,5.49 | v72.24,2.44 72.39,2.44 73.46,1.37 86.26,1.37 87.02,2.13 87.02,21.49 v86.72,21.79 | v87.94,21.79 87.94,27.74 88.7,28.5 88.7,30.94 J3.4 | R24.1 v89.76,19.51
  Bottom 0.152: v22.71,5.49 22.71,5.18 23.16,4.72 23.32,4.72 26.36,1.68 68.12,1.68 69.49,3.05 70.71,3.05 71.48,2.29 72.08,2.29 v72.24,2.44 | v86.72,21.79 v87.94,21.79 87.94,21.34 v89.76,19.51

## Text on the board
Top: LAYER: 1
GND: LAYER: 2
3.3V: LAYER: 3
Bottom: LAYER: 4
tPlace: RESET | RX | TX | SW_A | USART1 | SW_D | SW_E | SW_B | 3V3 | MOSI | MISO | SCK | M1G1 | M1G2 | 3V3 | 3V3 | MOSI | MISO | SCK | M2G1 | M2G2 | 3V3 | 3V3 | MOSI | MISO | SCK | M3G1 | M3G2 | 3V3 | 3V3 | MOSI | MISO | SCK | M4G1 | M4G2 | 3V3 | GND | GND | SPI1 | SPI2 | SPI2 | SW_C | SW_PWR | Pax Instruments | LabWiz 0.3
bPlace: CORTEX | ESP8266 | GND | GND | USART3 RX | USART3 TX | VBUS | I2C1 SCL | I2C1 SDA | GND | GND | USART3 RX | USART3 TX | VBUS | I2C1 SCL | I2C1 SDA | GND | GND | USART3 RX | USART3 TX | VBUS | I2C1 SCL | I2C1 SDA | GND | GND | USART3 RX | USART3 TX | VBUS | I2C1 SCL | SDA | USB_DP | BOOT0 / to SW_E | USB_DM